# EAGLE board USB StdBx (EAGLE 6.6.0)
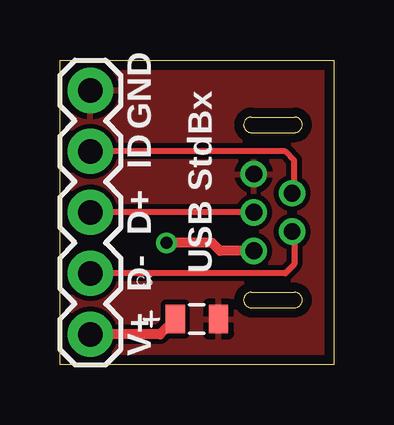
[diagram p0: board, top side]
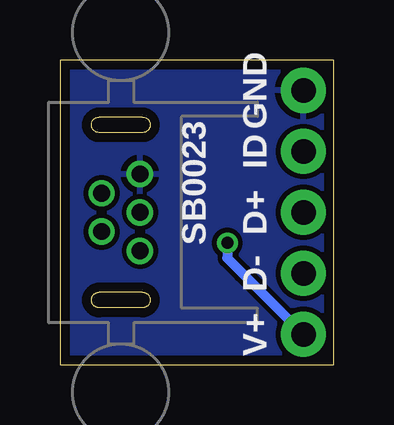
[diagram p1: board, bottom side, seen from below]

Size 11.43 x 12.7 mm. Coordinates in mm from the lower left corner, seen from the top.
Outline: 0,0 0,12.7 11.43,12.7 11.43,0 0,0
Copper layers (1*16): Top 0.0356mm / dielectric 1.5011mm / Bottom 0.0356mm
Design rules "LaenPCBOrder": minimum track width 6mil, minimum drill 13mil, track to track 6mil, track to pad 6mil, pad to pad 6mil, via to via 6mil, smd to smd 6mil, copper to edge 15mil, drill to drill 6mil, minimum pad ring 7mil, minimum via ring 7mil, stop-mask expansion 4mil, vias tented up to drill 0mil, thermal gap 10mil
Net classes: 0 default: width 0.203 mm; 1 power: width 0.254 mm

## Footprints (pad centres in the part's own frame; a part is rotated, then mirrored left to right if it is on the bottom)
0805-POL = smd 0.8 x 1.2: 1 -0.9,0; 2 0.9,0
USB_MINI-B_VT = drill 0.7 pad 1.1: 1 -1.6,-0.8; 2 -0.8,0.8; 3 0,-0.8; 4 0.8,0.8; 5 1.6,-0.8
1X05 = drill 1.016 pad 1.88: 1 0,0; 2 2.54,0; 3 5.08,0; 4 7.62,0; 5 10.16,0

## Placement (x,y rotation side)
C5  10uF  [0805-POL]  5.71,1.91 0 top
J1  USB_MINI-B_VT  [USB_MINI-B_VT]  8.89,6.35 90 bottom
JP1  [1X05]  1.27,1.27 90 top

## Library data of the parts
C5 J1 = ChipsParts
JP1 = SparkFun-Connectors

## Nets
5V: C5.1 J1.1 JP1.1
GND [power]: C5.2 J1.5 JP1.5
N$1: J1.2 JP1.2
N$2: J1.3 JP1.3
N$3 [power]: J1.4 JP1.4

## Tracks (layer width: path | path; a pad name or v marks a point on that pad's centre or on a via)
5V  (via drill 0.51)
  Top 0.406: C5.1 4.18,1.27 JP1.1 | v4.45,5.08 6.35,5.08 6.68,4.75 J1.1
  Bottom 0.406: v4.45,5.08 4.45,4.45 3.81,3.81 JP1.1
GND
  pour Bottom (isolate 0.203): 0,-0.03 0,12.7 11.43,12.7 11.43,-0.03
  pour Top (isolate 0.203): 0,-0.03 0,12.7 11.43,12.7 11.43,-0.03
N$1
  Top 0.254: J1.2 9.78,5.46 9.78,4.19 9.4,3.81 JP1.2
N$2
  Top 0.254: J1.3 JP1.3
N$3
  Top 0.254: J1.4 9.78,7.24 9.78,8.51 9.4,8.89 JP1.4

## Text on the board
tPlace: GND | ID | USB StdBx | D+ | D- | V+
bPlace: GND | SB0023 | ID | D+ | D- | V+
tValues: Close